# Altium PCB PCB1.PcbDoc
Units mm, origin at the board's own origin, x right, y up, seen from the top; angles counter-clockwise.
Board outline 152.4 x 101.6 mm, 2 copper layers (Top Layer, Bottom Layer); 16 components, 14 nets, 61 pads, 0 vias.
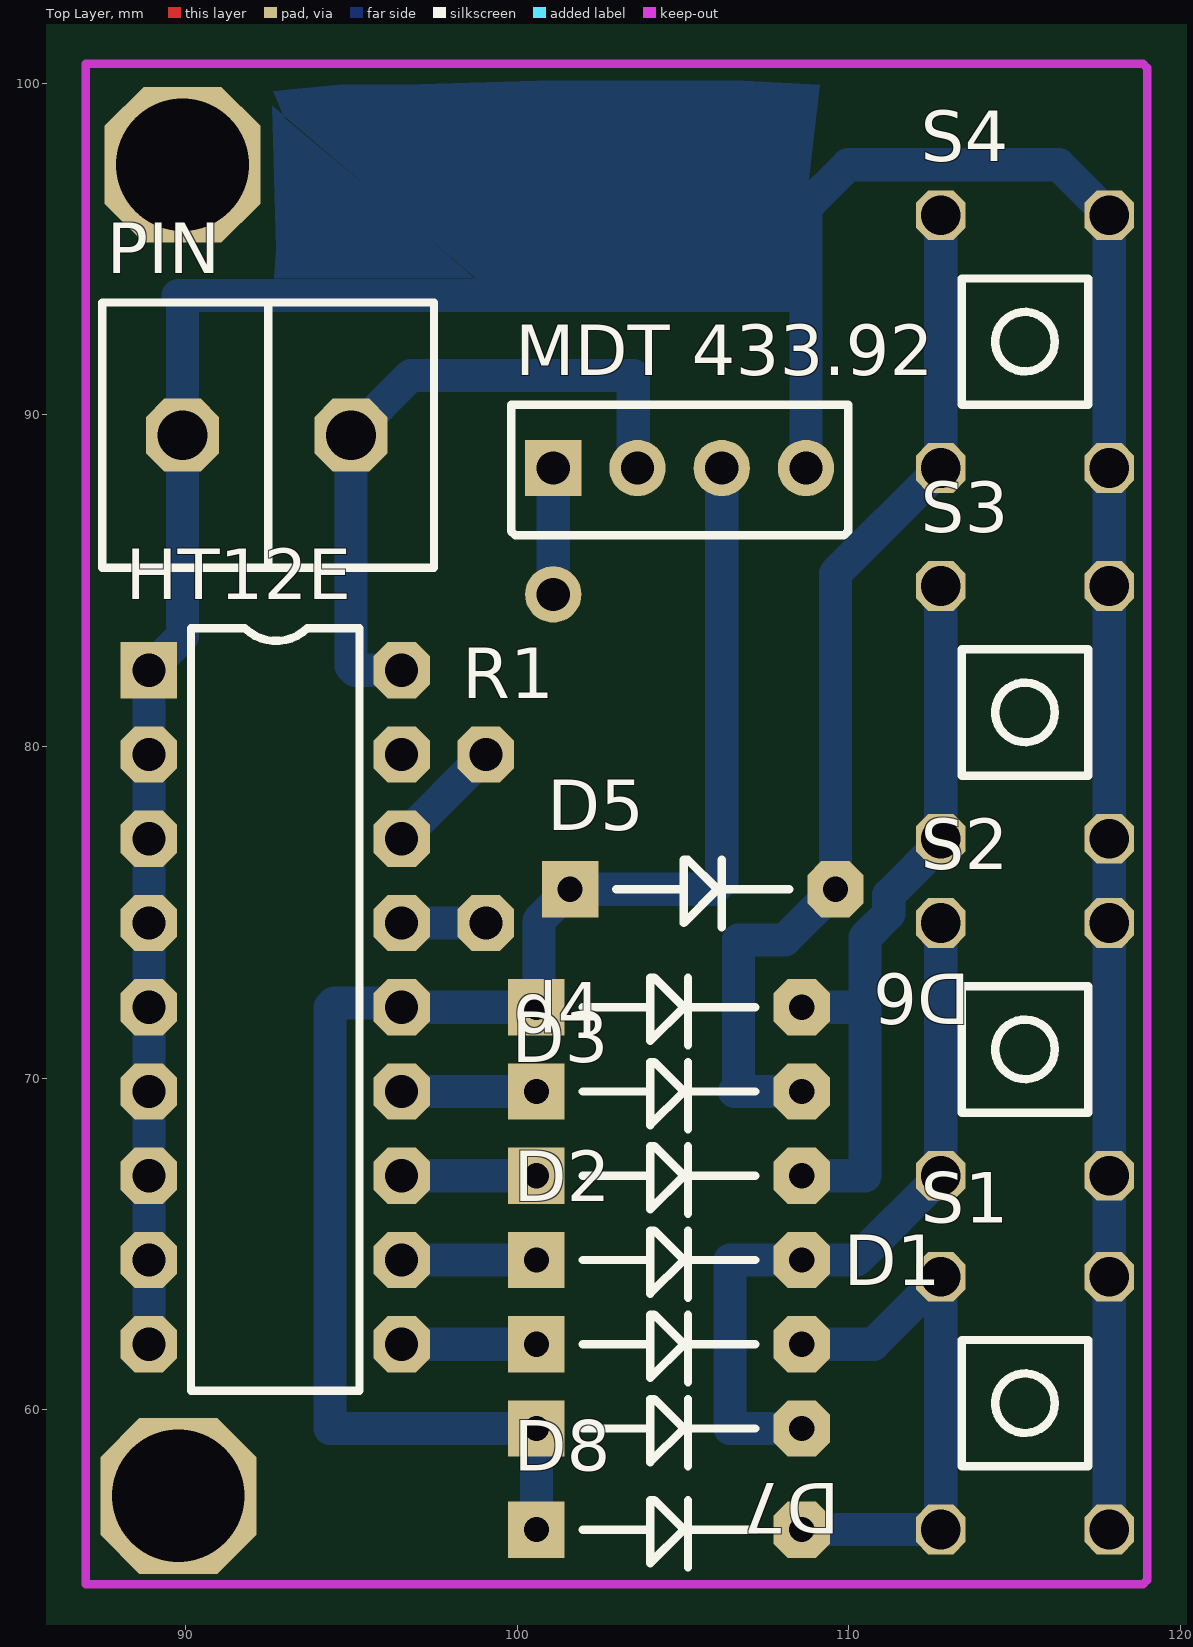
[diagram p0: Top Layer view]
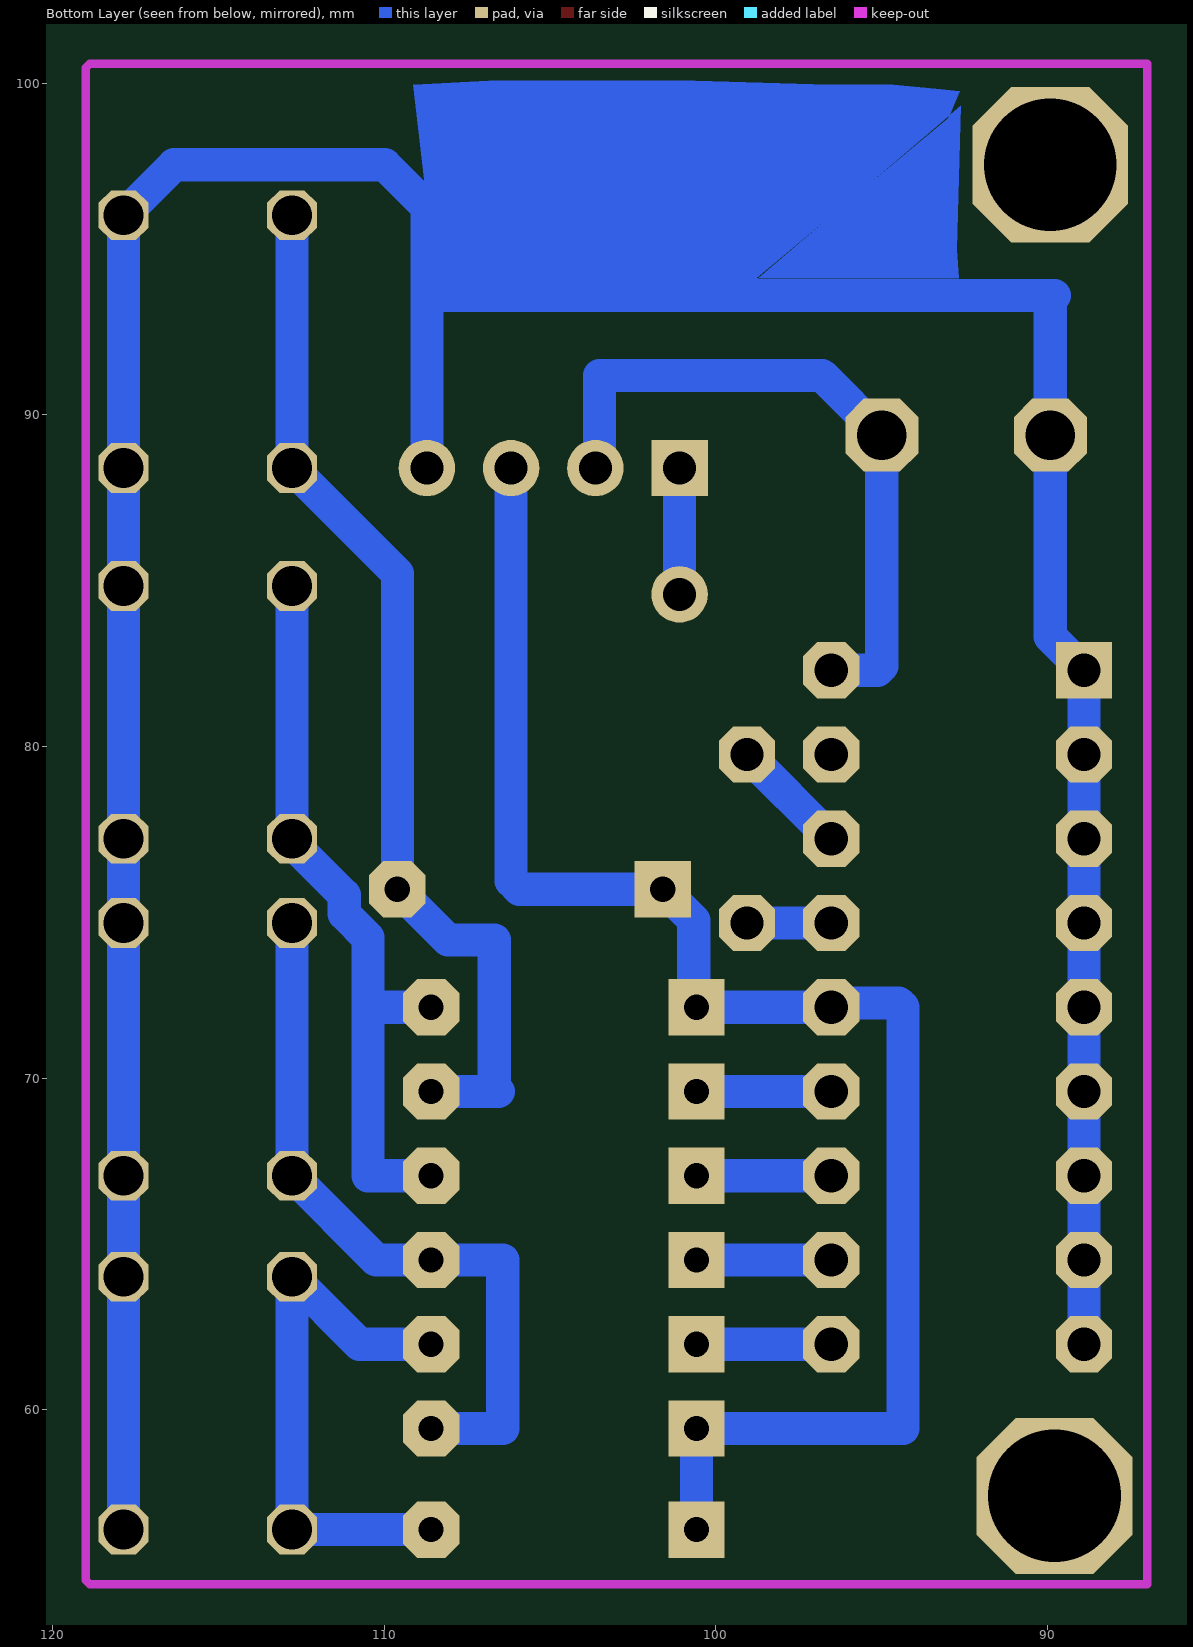
[diagram p1: Bottom Layer view, seen from below]

## Layer stack, top to bottom
Top Layer: signal copper 0.0356
Dielectric: dielectric 0.32, FR-4, Dk 4.8
Bottom Layer: signal copper 0.0356

## Board outline
25.4,25.4 177.8,25.4 177.8,127 25.4,127

## Design rules (kind name [scope] priority, off if disabled: settings)
Clearance [All] p1: gap=0.254
PolygonConnect [All] p1: connectstyle=Relief reliefconductorwidth=0.254 reliefentries=4 polygonreliefangle="90 Angle"
RoutingVias [All] p1: holewidth=0.711 width=1.27 viastyle="Through Hole" minholewidth=0.711 minwidth=1.27 maxholewidth=0.711 maxwidth=1.27
SilkscreenOverComponentPads [All] p1: minsilkscreentomaskgap=0.254
SolderMaskExpansion [All] p1: expansion=0.102
Width [All] p1: maxlimit=1 minlimit=1 preferedwidth=1
27 further rules are at their usual default settings.

## Components (designator, comment, footprint, x,y, rotation, side; value= is the part's Value field where it differs from the comment)
D1 "DIODE SMALL" "diode small" 100.584,61.976 r0 top
D2 "DIODE SMALL" "diode small" 100.584,64.516 r0 top
D3 "DIODE SMALL" "diode small" 100.584,67.056 r0 top
d4 "DIODE SMALL" "diode small" 100.584,69.596 r0 top
D5 "DIODE SMALL" "diode small" 101.6,75.692 r0 top
D6 "DIODE SMALL" "diode small" 100.584,72.136 r0 top
D7 "DIODE SMALL" "diode small" 100.584,59.436 r0 top
D8 "DIODE SMALL" "diode small" 100.584,56.388 r0 top
HT12E "dip-18pin" dip-18pin 88.9,82.296 r0 top
"MDT 433.92" "" PCBComponent_1 101.092,88.392 r0 top
PIN "Combicon 4pin" combicon-2pin_black 94.996,89.408 r270 top
R1 "1.12MHZ" "res- 2.54x3" 99.06,79.756 r270 top
S1 "SW-PB" sw-pb 112.776,64.008 r0 top
S2 "SW-PB" sw-pb 112.776,74.676 r0 top
S3 "SW-PB" sw-pb 112.776,84.836 r0 top
S4 "SW-PB" sw-pb 112.776,96.012 r0 top

## Footprints (in the part's own frame and the unit in brackets; to place one, negate y for a bottom-side part, rotate by r counter-clockwise, add the part's x,y. Pads: shape width x height; smd on the part's side, far side on the other; paste and mask are expansions set on the pad)
combicon-2pin_black [mm]
  oct 2.2x2.2 hole 1.5: 1(0.025,0) 2(0.025,-5.08)
  silkscreen extent -3.97,-7.5 4.03,2.5, body extent -3.91,-7.51 3.98,2.41, height 12.9
"diode small" [mm]
  rect 1.7x1.7 hole 0.762: 1(0,0)
  oct 1.7x1.7 hole 0.762: 2(8.001,0)
  silkscreen extent 1.4,-1.14 6.6,0.89, body extent -0.51,-1.02 8.5,1, height 3
dip-18pin [mm]
  rect 1.7x1.7 hole 1: 1(0,0)
  oct 1.7x1.7 hole 1: 2(0,-2.54) 3(0,-5.08) 4(0,-7.62) 5(0,-10.16) 6(0,-12.7) 7(0,-15.24) 8(0,-17.78) 9(0,-20.32) 10(7.62,-20.32) 11(7.62,-17.78) 12(7.62,-15.24) 13(7.62,-12.7) 14(7.62,-10.16) 15(7.62,-7.62) 16(7.62,-5.08) 17(7.62,-2.54) 18(7.62,0)
  silkscreen extent 1.27,-21.72 6.35,1.27, body extent -0.13,-21.72 7.87,1.27, height 2.51
PCBComponent_1 [mm]
  rect 1.7x1.7 hole 1: 1(0,0)
  round 1.7 hole 1: 2(2.54,0) 3(5.08,0) 4(7.62,0)
  silkscreen extent -1.27,-2.03 8.89,1.91
"res- 2.54x3" [mm]
  oct 1.7x1.7 hole 1: 1(0,0) 2(5.08,0)
  body extent -0.51,-0.98 5.57,1.02, height 3
sw-pb [mm]
  oct 1.5x1.5 hole 1.2: 1(0,-7.62) 1(0,0) 2(5.08,-7.62) 2(5.08,0)
  silkscreen extent 0.64,-5.71 4.44,-1.91, body extent -0.76,-8.38 5.84,0.76, height 5.5

## Part data
"MDT 433.92": library part Component_1
PIN: library part "Combicon - 2 pin_black"
R1: library part "Resistor 2.54x3"
S1 S2 S3 S4: "Switch"

## Free pads (board coordinates)
  round 1.7 hole 1: 0(101.092,84.582)
  oct 4.7x4.7 hole 4: 1(89.789,57.404) 2(89.916,97.536)

## Nets (pads, with @x,y where several pads share a name; then routed paths per layer and width w, separated by ;. In a path a pad name is that pad's centre, name@x,y a point inside that pad or via, vN(x,y) a via of type N, cw(c..) or ccw(c..) an arc to the next point about the centre after c; other vN are vias at no path point)
11: D1.2 D8.2 S1.1 | length 16.8
  Bottom Layer w1: D8.2 112.776,56.388 112.776,64.008 110.744,61.976 D1.2
12: D2.2 D7.2 S2.1 | length 22.3
  Bottom Layer w1: D7.2 106.426,59.436 106.426,64.516 D2.2 110.236,64.516 112.776,67.056 S2.1@112.776,74.676
ANTANNA: "MDT 433.92.1" pad.0 | length 3.9
  Bottom Layer w1: pad.0@101.092,84.455 pad.0 101.092,88.392
GND: "MDT 433.92.4" HT12E.1 HT12E.2 HT12E.3 HT12E.4 HT12E.5 HT12E.6 HT12E.7 HT12E.8 HT12E.9 PIN.2 S1.2 S2.2 S3.2 S4.2 | length 108.7
  Bottom Layer w1: HT12E.9 HT12E.8 HT12E.7 HT12E.6 HT12E.5 HT12E.4 HT12E.3 HT12E.2 HT12E.1 89.916,83.312 PIN.2 89.916,93.472 89.789,93.599 108.585,93.599 ; 108.712,88.392 108.712,96.266 109.982,97.536 116.332,97.536 117.856,96.012 117.856,88.392 117.856,84.836 117.856,77.216 117.856,74.676 117.856,74.549 117.856,67.056 117.856,64.008 S1.2@117.856,56.388
NetD1_1: D1.1 HT12E.10 | length 4.1
  Bottom Layer w1: HT12E.10 D1.1
NetD2_1: D2.1 HT12E.11 | length 4.1
  Bottom Layer w1: HT12E.11 D2.1
NetD3_1: D3.1 HT12E.12 | length 4.1
  Bottom Layer w1: HT12E.12 D3.1
Netd3_2: D3.2 D6.2 S3.1 | length 22.6
  Bottom Layer w1: D3.2 110.49,67.056 110.49,72.136 ; D6.2 110.49,72.136 ; S3.1@112.776,77.216 S3.1@112.776,84.836 ; S3.1@112.903,77.216 111.205,75.518 111.205,74.955 110.49,74.24 110.49,72.136
Netd4_1: d4.1 HT12E.13 | length 4.1
  Bottom Layer w1: HT12E.13 d4.1
Netd4_2: d4.2 D5.2 S4.1 | length 31.8
  Bottom Layer w1: d4.2 106.553,69.596 106.68,69.723 106.68,74.168 108.077,74.168 D5.2 109.601,85.217 112.776,88.392 S4.1@112.776,96.012
NetD5_1: "MDT 433.92.3" D5.1 D6.1 D7.1 D8.1 HT12E.14 | length 49.4
  Bottom Layer w0.254: D6.1 D6.1@100.711,72.136
  Bottom Layer w1: HT12E.14@96.393,72.263 94.488,72.263 94.361,72.136 94.361,59.436 D7.1 D8.1 ; HT12E.14 100.457,72.136 D6.1@100.584,72.009 ; D6.1 100.664,72.216 100.664,74.756 D5.1 105.918,75.692 106.172,75.946 106.172,88.392
NetHT12E_15: HT12E.15 R1.2 | length 2.5
  Bottom Layer w1: HT12E.15 R1.2
NetHT12E_16: HT12E.16 R1.1 | length 3.6
  Bottom Layer w1: HT12E.16 R1.1
VCC: "MDT 433.92.2" HT12E.18 PIN.1 | length 20.8
  Bottom Layer w1: PIN.1@94.916,89.303 PIN.1 ; HT12E.18 95.123,82.296 94.996,82.423 PIN.1 ; 103.505,88.265 103.505,91.186 96.799,91.186 PIN.1
pads on no net: HT12E.17

## Keep-outs
Keep-Out Layer:
  lines w0.254: 86.995,98.171 86.995,100.584 118.872,100.584 118.999,100.457 118.999,98.044 ; 86.995,98.552 86.995,98.298 86.995,54.737 118.872,54.737 118.999,54.864 118.999,98.425

## Other copper
Bottom Layer:
  region net GND: 92.678,94.107 92.742,94.996 92.615,99.314 99.028,93.853 108.68,93.853 108.553,93.98 108.426,93.98 109.125,99.949 106.839,100.076 100.616,100.076 96.552,99.949 94.647,99.949 93.377,99.822 92.647,99.758 92.996,98.933 98.774,94.107